# EAGLE board Joystick Module B (EAGLE 9.0.0)
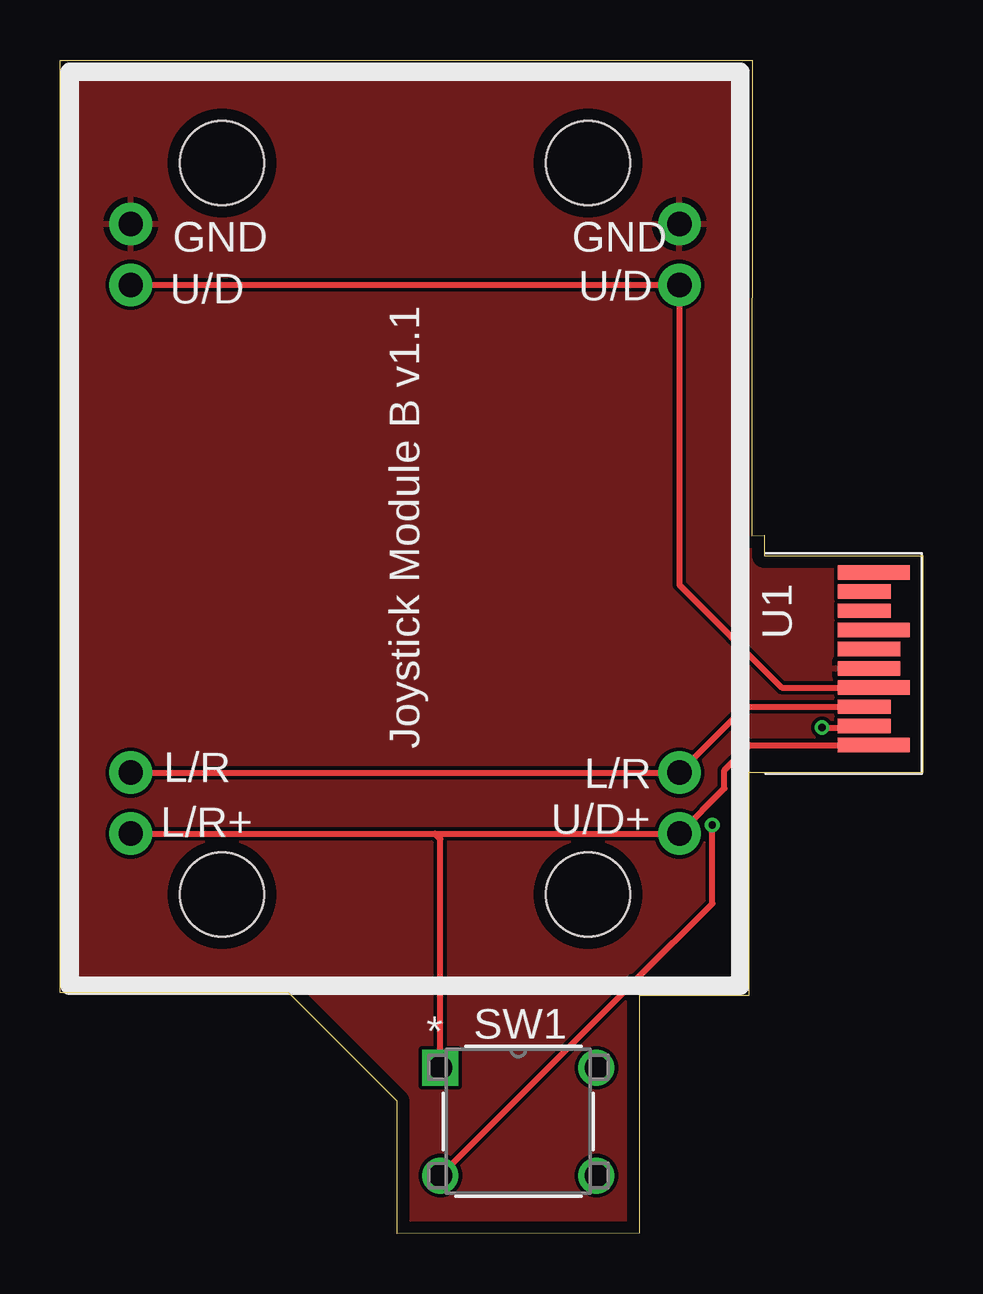
[diagram p0: board, top side]
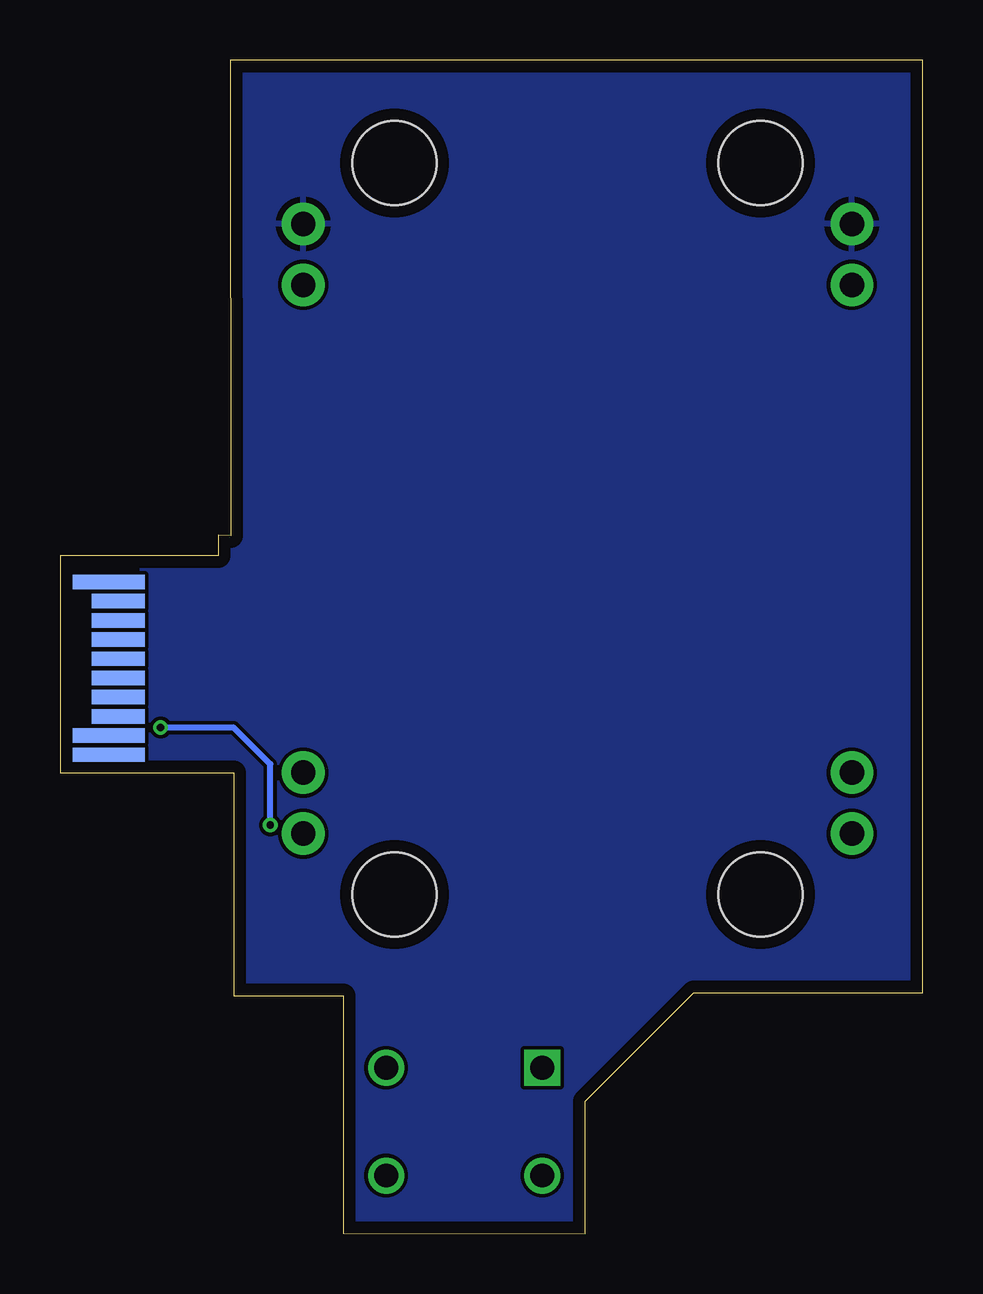
[diagram p1: board, bottom side, seen from below]

Size 35.94 x 48.91 mm. Coordinates in mm from the lower left corner, seen from the top.
Outline: 35.94,19.21 28.7,19.21 28.7,9.92 24.13,9.92 24.13,0.01 14.05,0 14.05,5.52 9.53,10.04 0,10.04 0,48.91 28.84,48.9 28.83,29.08 29.34,29.09 29.34,28.26 35.94,28.26 35.94,19.21
Copper layers (1*16): Top 0.035mm / dielectric 1.6mm / Bottom 0.035mm
Design rules "Elecrow_2-layer_PCB_eagle_rule": minimum track width 6mil, minimum drill 12mil, track to track 6mil, track to pad 6mil, pad to pad 6mil, via to via 8mil, smd to smd 0mil, copper to edge 20mil, drill to drill 10mil, minimum pad ring 6mil, minimum via ring 6mil, stop-mask expansion 0mil, vias tented up to drill 100mil, thermal gap 10mil

## Footprints (pad centres in the part's own frame; a part is rotated, then mirrored left to right if it is on the bottom)
SW4_1825910-G = drill 0.991 pad 1.499 square: 1 -6.502,4.496 | drill 0.991 pad 1.499: 2 0,4.496; 3 -6.502,0; 4 0,0
27800-JOYSTICK = drill 1.016 pad 1.778: 1 -11.43,12.7; 2 -11.43,10.16; 3 11.43,12.7; 4 11.43,10.16; 5 -11.43,-10.16; 6 -11.43,-12.7; 7 11.43,-10.16; 8 11.43,-12.7 | hole 3.5: -7.62,15.24; 7.62,15.24; -7.62,-15.24; 7.62,-15.24
EDGE_CONNECTOR_20POS_CONTACTS = smd 0.6 x 3 bottom: 1 -3.4,0; 9 3,0; 10 3.8,0 | smd 0.6 x 2.2 bottom: 2 -2.6,-0.4; 3 -1.8,-0.4; 4 -1,-0.4; 5 -0.2,-0.4; 6 0.6,-0.4; 7 1.4,-0.4; 8 2.2,-0.4 | smd 0.6 x 3: 11 3.4,0; 14 1,0; 17 -1.4,0; 20 -3.8,0 | smd 0.6 x 2.2: 12 2.6,-0.4; 13 1.8,-0.4; 18 -2.2,-0.4; 19 -3,-0.4 | smd 0.6 x 2.6: 15 0.2,-0.2; 16 -0.6,-0.2

## Placement (x,y rotation side)
SW1  2-1825910-7  [SW4_1825910-G]  22.35,2.42 0 top
U1  27800-JOYSTICK  [27800-JOYSTICK]  14.38,29.37 180 top
U$1  EDGE_CONNECTOR_20POS_CONTACTS  [EDGE_CONNECTOR_20POS_CONTACTS]  33.91,23.76 270 top

## Library data of the parts
SW1 = spst-tactile-switch; MANUFACTURER_PART_NUMBER: 218259107; VENDOR: TE Connectivity
U1 U$1 = thanics_robotics

## Nets
+3V3: SW1.1 U1.1 U1.3 U$1.11
GND: U1.6 U1.8 U$1.15
J2_SW: SW1.3 U$1.12
VRX: U1.2 U1.4 U$1.13
VRY: U1.5 U1.7 U$1.14

## Tracks (layer width: path | path; a pad name or v marks a point on that pad's centre or on a via)
+3V3
  Top 0.254: U$1.11 28.73,20.36 27.69,19.31 27.69,18.55 U1.1 15.62,16.67 | U1.3 15.62,16.67 | SW1.1 15.85,16.44 15.62,16.67
GND
  pour Bottom: -5.21,59.4 32.56,59.22 32.56,0.16 -5.21,0.34
  pour Top: -5.16,59.22 32.56,59.17 32.44,0.11 -5.28,0.16
J2_SW  (via drill 0.3)
  Top 0.254: v27.18,17.03 27.18,13.75 23.98,10.55 23.87,10.55 23.5,10.18 23.5,10.07 SW1.3 | v31.75,21.09 33.44,21.09 U$1.12
  Bottom 0.254: v27.18,17.03 27.18,19.57 28.7,21.09 v31.75,21.09
VRX
  Top 0.254: U$1.13 28.55,21.96 25.91,19.31 U1.2 U1.4
VRY
  Top 0.254: U1.7 U1.5 25.81,27.04 30.08,22.76 U$1.14

## Text on the board
tNames: GND | GND | U/D | U/D | Joystick Module B v1.1 | L/R | L/R | L/R+ | U/D+